# EAGLE board hexapod - Copy (EAGLE 6.4), part 1 of 2
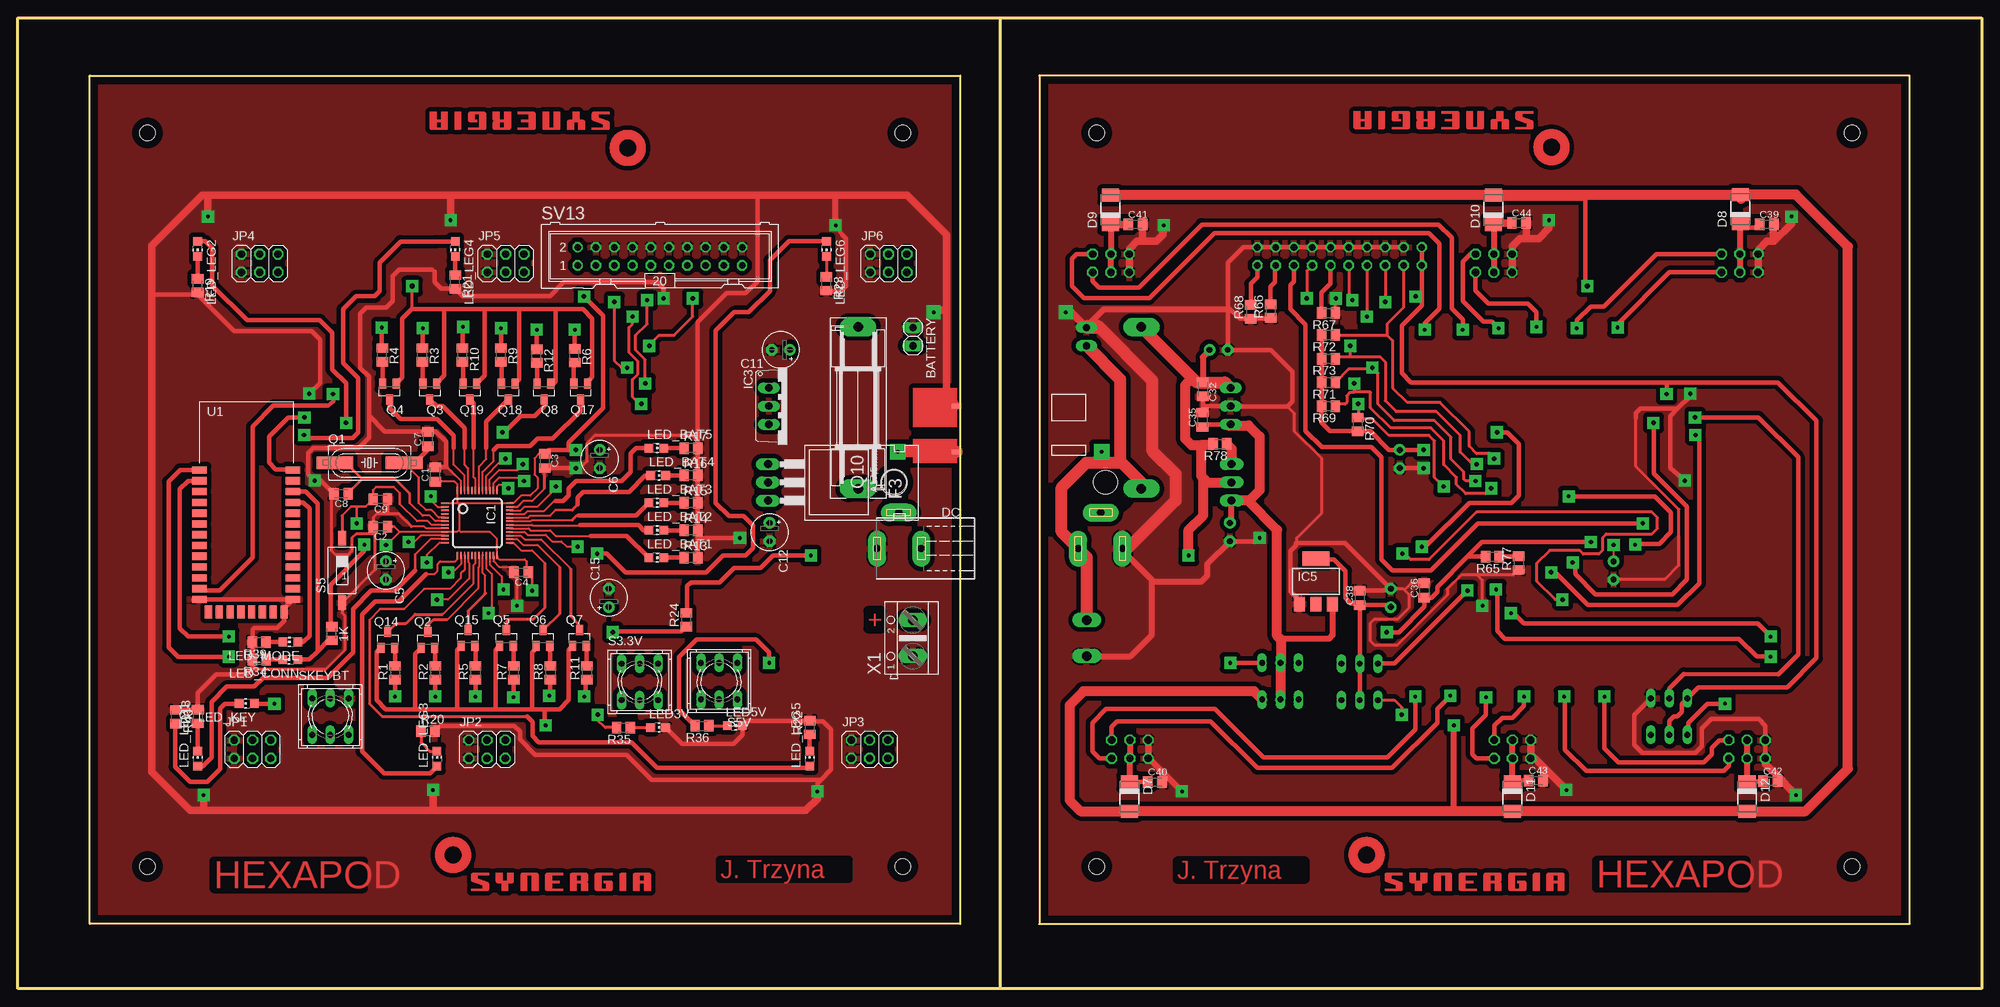
[diagram p0: board, top side]
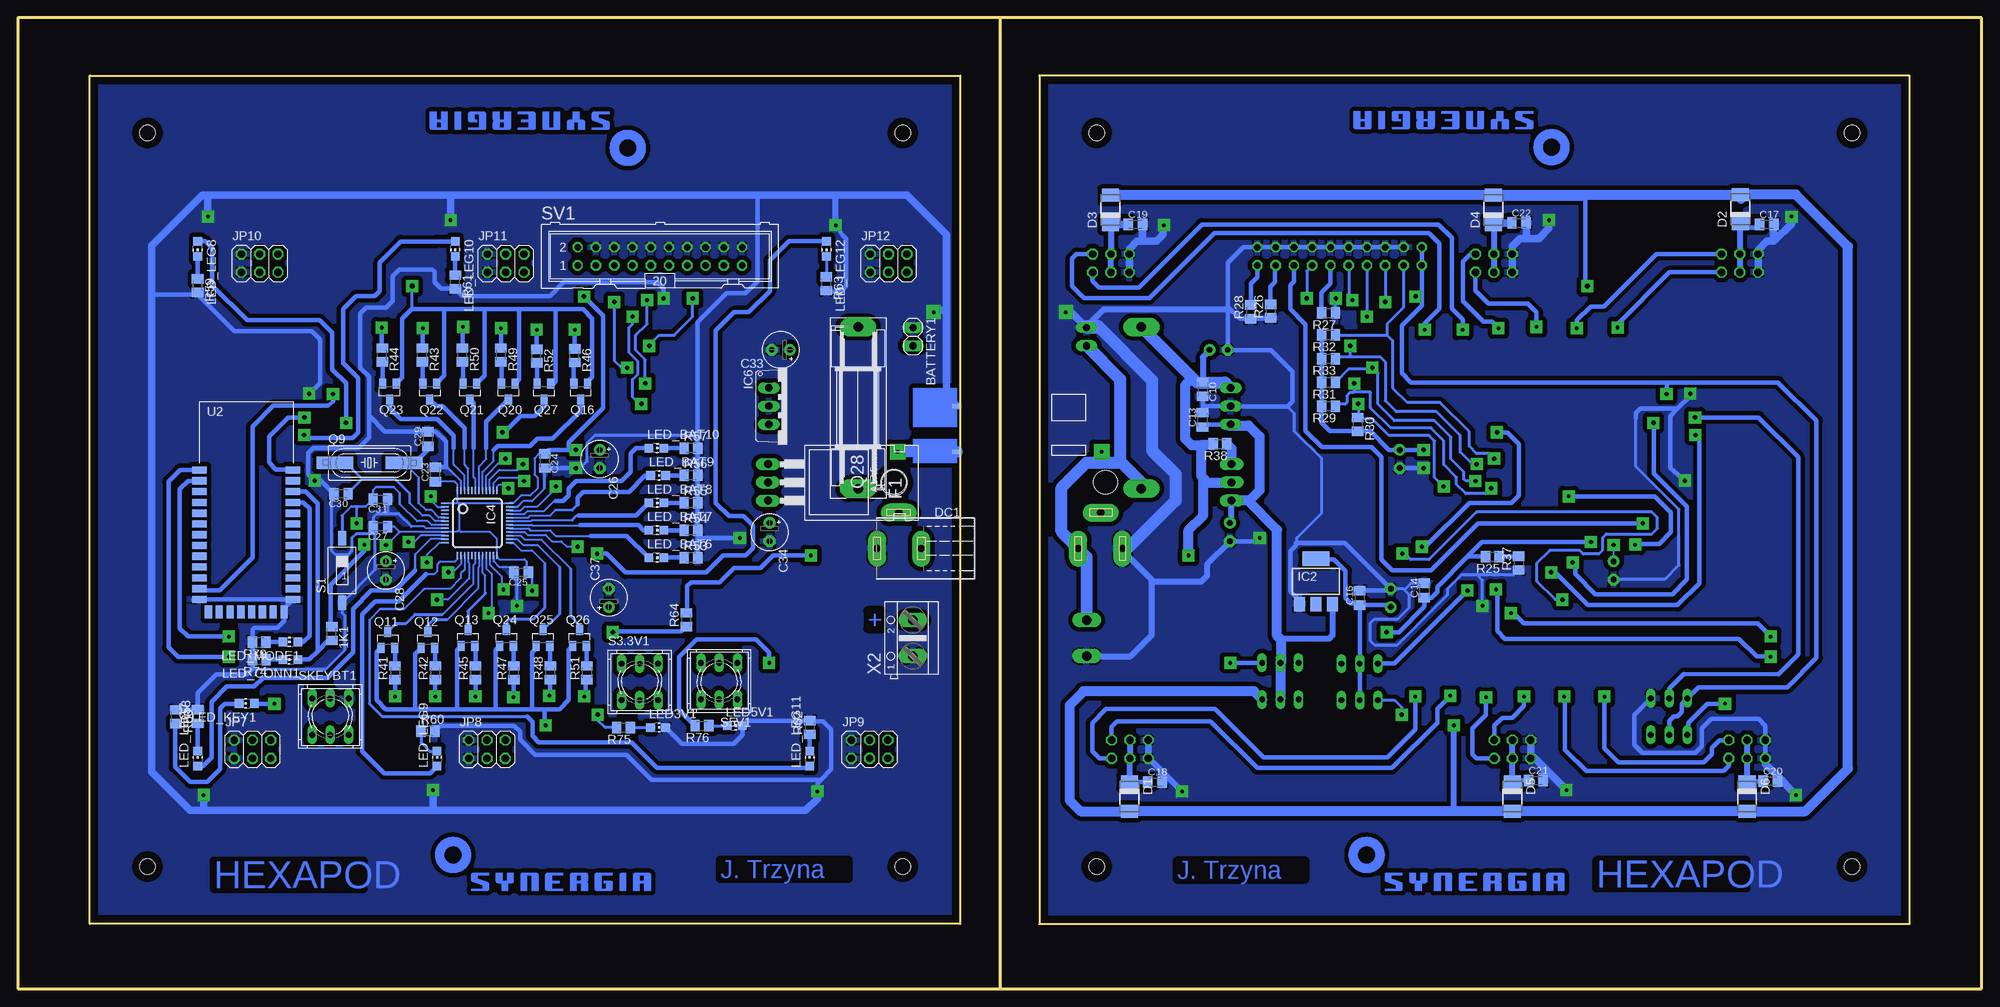
[diagram p1: board, bottom side, seen from below]

Size 273 x 135 mm. Coordinates in mm from the lower left corner, seen from the top.
Outline: 136.5,135 0,135 0,0 136.5,0
Outline: 136.5,135 273,135 273,0 136.5,0
Outline: 136.5,135 136.5,0
Outline: 10,127 131,127 131,9 10,9 10,127
Outline: 263,127 142,127 142,9 263,9 263,127
Copper layers (1*16): Top 0.035mm / dielectric 1.5mm / Bottom 0.035mm
Design rules "default": minimum track width 10mil, minimum drill 24mil, track to track 8mil, track to pad 8mil, pad to pad 8mil, via to via 8mil, smd to smd 8mil, copper to edge 40mil, drill to drill 8mil, minimum pad ring 10mil, minimum via ring 8mil, stop-mask expansion 4mil, vias tented up to drill 0mil, thermal gap 10mil
Holes 2.2 mm at 18,119 123,119 123,17 18,17 255,119 150,119 150,17 255,17

## Footprints (pad centres in the part's own frame; a part is rotated, then mirrored left to right if it is on the bottom)
M0805 = smd 1.3 x 1.6: 1 -0.95,0; 2 0.95,0
1X02 = drill 1.016 long: 1 -1.27,0; 2 1.27,0
C0805K = smd 1.3 x 1.6: 1 -1,0; 2 1,0
E2,5-5 = drill 0.813 pad 1.6: + -1.27,0 | drill 0.813 pad 1.6 octagon: - 1.27,0
DO-214AC = smd 1.8 x 2.4: A 2.025,0; C -2.025,0
733980-62 = drill 1 pad 2.5 long: 1 0,8.57; 2 0,2.42; 3 5,5.57
SH22,5 = drill 1.321 pad 2.54 long: 1 -11.252,0; 2 11.252,0
TQFP48 = smd 0.2 x 1: 1 -2.75,-4.5; 2 -2.25,-4.5; 3 -1.75,-4.5; 4 -1.25,-4.5; 5 -0.75,-4.5; 6 -0.25,-4.5; 7 0.25,-4.5; 8 0.75,-4.5; 9 1.25,-4.5; 10 1.75,-4.5; 11 2.25,-4.5; 12 2.75,-4.5; 25 2.75,4.5; 26 2.25,4.5; 27 1.75,4.5; 28 1.25,4.5; 29 0.75,4.5; 30 0.25,4.5; 31 -0.25,4.5; 32 -0.75,4.5; 33 -1.25,4.5; 34 -1.75,4.5; 35 -2.25,4.5; 36 -2.75,4.5 | smd 1 x 0.2: 13 4.5,-2.75; 14 4.5,-2.25; 15 4.5,-1.75; 16 4.5,-1.25; 17 4.5,-0.75; 18 4.5,-0.25; 19 4.5,0.25; 20 4.5,0.75; 21 4.5,1.25; 22 4.5,1.75; 23 4.5,2.25; 24 4.5,2.75; 37 -4.5,2.75; 38 -4.5,2.25; 39 -4.5,1.75; 40 -4.5,1.25; 41 -4.5,0.75; 42 -4.5,0.25; 43 -4.5,-0.25; 44 -4.5,-0.75; 45 -4.5,-1.25; 46 -4.5,-1.75; 47 -4.5,-2.25; 48 -4.5,-2.75
SOT223 = smd 1.5 x 2: 1 -2.3,-3.15; 2 0,-3.15; 3 2.3,-3.15 | smd 3.8 x 2: 4 0,3.15
TO220V = drill 1.016 long: 1 -2.54,-2.54; 2 0,-2.54; 3 2.54,-2.54
2X03 = drill 1.016 octagon: 1 -2.54,-1.27; 2 -2.54,1.27; 3 0,-1.27; 4 0,1.27; 5 2.54,-1.27; 6 2.54,1.27
CHIP-LED0805 = smd 1.2 x 1.2: A 0,-1.05; C 0,1.05
SM49 = smd 5.08 x 1.778: 1 -4.826,0; 2 4.826,0
SOT23 = smd 1 x 1.4: 1 -0.95,-1.1; 2 0.95,-1.1; 3 0,1.1
TO220 = drill 1.118 long: 1 -2.54,-6.35; 2 0,-6.35; 3 2.54,-6.35 | hole 3.302: 0,11.176
SMS-001 = smd 1.092 x 2.007: 1 0,-4.496; 2 0,4.496
9077-2 = drill 0.813 long: 1 -2.54,2.54; 2 0,2.54; 3 2.54,2.54; 4 -2.54,-2.54; 5 0,-2.54; 6 2.54,-2.54
ML20 = drill 0.914 octagon: 1 -11.43,-1.27; 2 -11.43,1.27; 3 -8.89,-1.27; 4 -8.89,1.27; 5 -6.35,-1.27; 6 -6.35,1.27; 7 -3.81,-1.27; 8 -3.81,1.27; 9 -1.27,-1.27; 10 -1.27,1.27; 11 1.27,-1.27; 12 1.27,1.27; 13 3.81,-1.27; 14 3.81,1.27; 15 6.35,-1.27; 16 6.35,1.27; 17 8.89,-1.27; 18 8.89,1.27; 19 11.43,-1.27; 20 11.43,1.27
BLUETOOTH_SMD = smd 2 x 1: 1 0,0; 2 0,-1.5; 3 0,-3; 4 0,-4.5; 5 0,-6; 6 0,-7.5; 7 0,-9; 8 0,-10.5; 9 0,-12; 10 0,-13.5; 11 0,-15; 12 0,-16.5; 13 0,-18; 22 13,-18; 23 13,-16.5; 24 13,-15; 25 13,-13.5; 26 13,-12; 27 13,-10.5; 28 13,-9; 29 13,-7.5; 30 13,-6; 31 13,-4.5; 32 13,-3; 33 13,-1.5; 34 13,0 | smd 1 x 1.8: 14 1.25,-19.75; 15 2.75,-19.75; 16 4.25,-19.75; 17 5.75,-19.75; 18 7.25,-19.75; 19 8.75,-19.75; 20 10.25,-19.75; 21 11.75,-19.75
DEANSM = smd 1.27 x 0.635: P$NEG 3.175,3.81; P$POS 3.175,-2.54
AK500/2 = drill 1.321 long: 1 -2.515,0; 2 2.515,0

## Placement (x,y rotation side)
1K  470  [M0805]  43.63,49.39 270 top
1K1  470  [M0805]  229.37,49.39 270 bottom
BATTERY  [1X02]  124.44,90.68 270 top
BATTERY1  [1X02]  148.56,90.68 270 bottom
C1  100n  [C0805K]  58.01,71.53 90 top
C2  10n  [C0805K]  50.39,64.26 180 top
C3  100n  [C0805K]  73.25,73.41 270 top
C4  100n  [C0805K]  69.95,57.91 180 top
C5  1u  [E2,5-5]  51.15,58.17 270 top
C6  4.7uF  [E2,5-5]  80.87,73.66 270 top
C7  10p  [C0805K]  56.99,76.45 90 top
C8  10p  [C0805K]  44.9,68.83 180 top
C9  100n  [C0805K]  50.39,68.07 180 top
C10  100n  [C0805K]  108.25,83.36 270 bottom
C11  47uF  [E2,5-5]  106.07,88.85 180 top
C12  47uF  [E2,5-5]  104.5,63.5 270 top
C13  100n  [C0805K]  108.32,79.12 90 bottom
C14  100n  [C0805K]  77.46,55.37 90 bottom
C15  47uF  [E2,5-5]  82.14,54.36 90 top
C16  100n  [C0805K]  86.46,54.36 90 bottom
C17  100n  [C0805K]  29.86,106.27 0 bottom
C18  100n  [C0805K]  114.9,28.75 0 bottom
C19  100n  [C0805K]  117.65,106.27 0 bottom
C20  100n  [C0805K]  29.36,28.85 0 bottom
C21  100n  [C0805K]  61.97,28.96 0 bottom
C22  100n  [C0805K]  64.31,106.48 0 bottom
C23  100n  [C0805K]  214.99,71.53 90 bottom
C24  100n  [C0805K]  199.75,73.41 270 bottom
C25  100n  [C0805K]  203.05,57.91 180 bottom
C26  4.7uF  [E2,5-5]  192.13,73.66 270 bottom
C27  10n  [C0805K]  222.61,64.26 180 bottom
C28  1u  [E2,5-5]  221.85,58.17 270 bottom
C29  10p  [C0805K]  216.01,76.45 90 bottom
C30  10p  [C0805K]  228.1,68.83 180 bottom
C31  100n  [C0805K]  222.61,68.07 180 bottom
C32  100n  [C0805K]  164.75,83.36 270 top
C33  47uF  [E2,5-5]  166.93,88.85 180 bottom
C34  47uF  [E2,5-5]  168.5,63.5 270 bottom
C35  100n  [C0805K]  164.68,79.12 90 top
C36  100n  [C0805K]  195.54,55.37 90 top
C37  47uF  [E2,5-5]  190.86,54.36 90 bottom
C38  100n  [C0805K]  186.54,54.36 90 top
C39  100n  [C0805K]  243.14,106.27 0 top
C40  100n  [C0805K]  158.1,28.75 0 top
C41  100n  [C0805K]  155.35,106.27 0 top
C42  100n  [C0805K]  243.64,28.85 0 top
C43  100n  [C0805K]  211.03,28.96 0 top
C44  100n  [C0805K]  208.69,106.48 0 top
D1  [DO-214AC]  118.46,26.72 270 bottom
D2  [DO-214AC]  33.52,108.41 90 bottom
D3  [DO-214AC]  121.1,108.31 90 bottom
D4  [DO-214AC]  67.86,108.31 90 bottom
D5  [DO-214AC]  65.22,26.72 270 bottom
D6  [DO-214AC]  32.61,26.72 270 bottom
D7  [DO-214AC]  154.54,26.72 270 top
D8  [DO-214AC]  239.48,108.41 90 top
D9  [DO-214AC]  151.9,108.31 90 top
D10  [DO-214AC]  205.14,108.31 90 top
D11  [DO-214AC]  207.78,26.72 270 top
D12  [DO-214AC]  240.39,26.72 270 top
DC  [733980-62]  128.02,61.21 90 top
DC1  [733980-62]  144.98,61.21 90 bottom
F1  2A  [SH22,5]  156.19,80.79 90 bottom
F3  2A  [SH22,5]  116.81,80.79 90 top
IC1  STM32F10XCXT6  [TQFP48]  63.85,64.77 270 top
IC2  LM1117S(3.3)  [SOT223]  92.55,56.64 0 bottom
IC3  7805TV  [TO220V]  106.93,81.03 270 top
IC4  STM32F10XCXT6  [TQFP48]  209.15,64.77 270 bottom
IC5  LM1117S(3.3)  [SOT223]  180.45,56.64 0 top
IC6  7805TV  [TO220V]  166.07,81.03 270 bottom
JP1  [2X03]  32.6,33.3 0 top
JP2  [2X03]  65.21,33.3 0 top
JP3  [2X03]  118.4,33.3 0 top
JP4  [2X03]  33.6,100.9 0 top
JP5  [2X03]  67.8,100.9 0 top
JP6  [2X03]  121.04,100.9 0 top
JP7  [2X03]  240.4,33.3 0 bottom
JP8  [2X03]  207.79,33.3 0 bottom
JP9  [2X03]  154.6,33.3 0 bottom
JP10  [2X03]  239.4,100.9 0 bottom
JP11  [2X03]  205.2,100.9 0 bottom
JP12  [2X03]  151.96,100.9 0 bottom
LED3V  Green  [CHIP-LED0805]  89,36.32 270 top
LED3V1  Green  [CHIP-LED0805]  184,36.32 270 bottom
LED5V  Green  [CHIP-LED0805]  99.66,36.58 270 top
LED5V1  Green  [CHIP-LED0805]  173.34,36.58 270 bottom
LED_BAT1  Green  [CHIP-LED0805]  88.74,59.94 270 top
LED_BAT2  Green  [CHIP-LED0805]  88.74,63.75 270 top
LED_BAT3  Green  [CHIP-LED0805]  88.74,67.56 270 top
LED_BAT4  Yellow  [CHIP-LED0805]  89,71.37 270 top
LED_BAT5  Red  [CHIP-LED0805]  88.74,75.18 270 top
LED_BAT6  Green  [CHIP-LED0805]  184.26,59.94 270 bottom
LED_BAT7  Green  [CHIP-LED0805]  184.26,63.75 270 bottom
LED_BAT8  Green  [CHIP-LED0805]  184.26,67.56 270 bottom
LED_BAT9  Yellow  [CHIP-LED0805]  184,71.37 270 bottom
LED_BAT10  Red  [CHIP-LED0805]  184.26,75.18 270 bottom
LED_CONN  blue  [CHIP-LED0805]  37.88,45.77 90 top
LED_CONN1  blue  [CHIP-LED0805]  235.12,45.77 90 bottom
LED_KEY  red  [CHIP-LED0805]  31.81,39.68 90 top
LED_KEY1  red  [CHIP-LED0805]  241.19,39.68 90 bottom
LED_LEG1  blue  [CHIP-LED0805]  24.99,32 0 top
LED_LEG2  blue  [CHIP-LED0805]  24.99,102.9 180 top
LED_LEG3  blue  [CHIP-LED0805]  58.26,32 0 top
LED_LEG4  blue  [CHIP-LED0805]  60.8,102.9 180 top
LED_LEG5  blue  [CHIP-LED0805]  110.08,32 0 top
LED_LEG6  blue  [CHIP-LED0805]  112.41,102.9 180 top
LED_LEG7  blue  [CHIP-LED0805]  248.01,32 0 bottom
LED_LEG8  blue  [CHIP-LED0805]  248.01,102.9 180 bottom
LED_LEG9  blue  [CHIP-LED0805]  214.74,32 0 bottom
LED_LEG10  blue  [CHIP-LED0805]  212.2,102.9 180 bottom
LED_LEG11  blue  [CHIP-LED0805]  162.92,32 0 bottom
LED_LEG12  blue  [CHIP-LED0805]  160.59,102.9 180 bottom
LED_MODE  green  [CHIP-LED0805]  37.9,48.22 90 top
LED_MODE1  green  [CHIP-LED0805]  235.1,48.22 90 bottom
Q1  24MHz  [SM49]  48.86,73.15 0 top
Q2  SST5486  [SOT23]  56.99,48.51 0 top
Q3  SST5486  [SOT23]  57.25,83.06 180 top
Q4  SST5486  [SOT23]  51.66,83.06 180 top
Q5  SST5486  [SOT23]  67.91,48.77 0 top
Q6  SST5486  [SOT23]  72.99,48.77 0 top
Q7  SST5486  [SOT23]  78.07,48.77 0 top
Q8  SST5486  [SOT23]  73.15,83.06 180 top
Q9  24MHz  [SM49]  224.14,73.15 0 bottom
Q10  BUZ11  [TO220]  110.63,70.42 270 top
Q11  SST5486  [SOT23]  221.6,48.51 0 bottom
Q12  SST5486  [SOT23]  216.01,48.51 0 bottom
Q13  SST5486  [SOT23]  210.42,48.77 0 bottom
Q14  SST5486  [SOT23]  51.4,48.51 0 top
Q15  SST5486  [SOT23]  62.58,48.77 0 top
Q16  SST5486  [SOT23]  194.77,83.06 180 bottom
Q17  SST5486  [SOT23]  78.23,83.06 180 top
Q18  SST5486  [SOT23]  68.17,83.06 180 top
Q19  SST5486  [SOT23]  62.83,83.06 180 top
Q20  SST5486  [SOT23]  204.83,83.06 180 bottom
Q21  SST5486  [SOT23]  210.17,83.06 180 bottom
Q22  SST5486  [SOT23]  215.75,83.06 180 bottom
Q23  SST5486  [SOT23]  221.34,83.06 180 bottom
Q24  SST5486  [SOT23]  205.09,48.77 0 bottom
Q25  SST5486  [SOT23]  200.01,48.77 0 bottom
Q26  SST5486  [SOT23]  194.93,48.77 0 bottom
Q27  SST5486  [SOT23]  199.85,83.06 180 bottom
Q28  BUZ11  [TO220]  162.37,70.42 270 bottom
R1  1k  [M0805]  52.42,43.94 90 top
R2  1k  [M0805]  58.01,43.94 90 top
R3  1k  [M0805]  56.23,88.14 270 top
R4  1k  [M0805]  50.64,88.14 270 top
R5  1k  [M0805]  63.6,43.94 90 top
R6  1k  [M0805]  77.41,88.04 270 top
R7  1k  [M0805]  68.93,43.94 90 top
R8  1k  [M0805]  74.01,43.94 90 top
R9  1k  [M0805]  67.15,88.14 270 top
R10  1k  [M0805]  61.82,88.14 270 top
R11  1k  [M0805]  79.09,43.94 90 top
R12  1k  [M0805]  72.13,87.99 270 top
R13  470  [M0805]  93.57,59.94 0 top
R14  470  [M0805]  93.57,63.75 0 top
R15  470  [M0805]  93.57,67.56 0 top
R16  470  [M0805]  93.57,71.37 0 top
R17  470  [M0805]  93.57,75.18 0 top
R18  470  [M0805]  24.99,37.85 90 top
R19  470  [M0805]  24.99,97.79 270 top
R20  470  [M0805]  56.99,35.81 0 top
R21  470  [M0805]  60.8,98.3 270 top
R22  470  [M0805]  110.08,36.32 90 top
R23  470  [M0805]  112.41,98.04 270 top
R24  3K9  [M0805]  92.91,51.31 90 top
R25  2k2  [M0805]  68.02,60.1 180 bottom
R26  10k  [M0805]  98.85,94.23 90 bottom
R27  10k  [M0805]  90.77,93.98 180 bottom
R28  10k  [M0805]  101.59,94.13 90 bottom
R29  10k  [M0805]  90.77,81.03 180 bottom
R30  10k  [M0805]  86.71,78.49 270 bottom
R31  10k  [M0805]  90.77,84.33 180 bottom
R32  10k  [M0805]  90.77,90.93 180 bottom
R33  10k  [M0805]  90.77,87.63 180 bottom
R34  470  [M0805]  33.56,45.77 180 top
R35  470  [M0805]  84.17,36.32 180 top
R36  680  [M0805]  95.09,36.58 180 top
R37  680R  [M0805]  64.36,59.18 90 bottom
R38  680R  [M0805]  105.88,75.77 180 bottom
R39  470  [M0805]  33.55,48.19 180 top
R40  470  [M0805]  22,37.82 270 top
R41  1k  [M0805]  220.58,43.94 90 bottom
R42  1k  [M0805]  214.99,43.94 90 bottom
R43  1k  [M0805]  216.77,88.14 270 bottom
R44  1k  [M0805]  222.36,88.14 270 bottom
R45  1k  [M0805]  209.4,43.94 90 bottom
R46  1k  [M0805]  195.59,88.04 270 bottom
R47  1k  [M0805]  204.07,43.94 90 bottom
R48  1k  [M0805]  198.99,43.94 90 bottom
R49  1k  [M0805]  205.85,88.14 270 bottom
R50  1k  [M0805]  211.18,88.14 270 bottom
R51  1k  [M0805]  193.91,43.94 90 bottom
R52  1k  [M0805]  200.87,87.99 270 bottom
R53  470  [M0805]  179.43,59.94 0 bottom
R54  470  [M0805]  179.43,63.75 0 bottom
R55  470  [M0805]  179.43,67.56 0 bottom
R56  470  [M0805]  179.43,71.37 0 bottom
R57  470  [M0805]  179.43,75.18 0 bottom
R58  470  [M0805]  248.01,37.85 90 bottom
R59  470  [M0805]  248.01,97.79 270 bottom
R60  470  [M0805]  216.01,35.81 0 bottom
R61  470  [M0805]  212.2,98.3 270 bottom
R62  470  [M0805]  162.92,36.32 90 bottom
R63  470  [M0805]  160.59,98.04 270 bottom
R64  3K9  [M0805]  180.09,51.31 90 bottom
R65  2k2  [M0805]  204.98,60.1 180 top
R66  10k  [M0805]  174.15,94.23 90 top
R67  10k  [M0805]  182.23,93.98 180 top
R68  10k  [M0805]  171.41,94.13 90 top
R69  10k  [M0805]  182.23,81.03 180 top
R70  10k  [M0805]  186.29,78.49 270 top
R71  10k  [M0805]  182.23,84.33 180 top
R72  10k  [M0805]  182.23,90.93 180 top
R73  10k  [M0805]  182.23,87.63 180 top
R74  470  [M0805]  239.44,45.77 180 bottom
R75  470  [M0805]  188.83,36.32 180 bottom
R76  680  [M0805]  177.91,36.58 180 bottom
R77  680R  [M0805]  208.64,59.18 90 top
R78  680R  [M0805]  167.12,75.77 180 top
R79  470  [M0805]  239.45,48.19 180 bottom
R80  470  [M0805]  251,37.82 270 bottom
S1  reset  [SMS-001]  227.95,58.17 0 bottom
S3.3V  9077-2  [9077-2]  86.46,42.67 0 top
S3.3V1  9077-2  [9077-2]  186.54,42.67 0 bottom
S5  reset  [SMS-001]  45.05,58.17 0 top
S5V  9077-2  [9077-2]  97.48,42.77 180 top
S5V1  9077-2  [9077-2]  175.52,42.77 180 bottom
SKEYBT  9077-2  [9077-2]  43.43,37.85 0 top
SKEYBT1  9077-2  [9077-2]  229.57,37.85 0 bottom
SV1  [ML20]  183.75,101.85 0 bottom
SV13  [ML20]  89.25,101.85 0 top
U1  HC_06  [BLUETOOTH_SMD]  25.24,72.14 0 top
U2  HC_06  [BLUETOOTH_SMD]  247.76,72.14 0 bottom
U$1  DEANS.MALE  [DEANSM]  127.33,77.22 0 top
U$2  [SYNERGIA_30MM]  58.01,13.61 0 top
U$3  [SYNERGIA_30MM]  87.27,121.92 180 top
U$4  [SYNERGIA_30MM]  57.3,122.02 180 bottom
U$5  [SYNERGIA_30MM]  87.98,13.61 0 bottom
U$6  DEANS.MALE  [DEANSM]  145.67,77.22 0 bottom
U$7  [SYNERGIA_30MM]  214.99,13.61 0 bottom
U$8  [SYNERGIA_30MM]  185.73,121.92 180 bottom
U$9  [SYNERGIA_30MM]  215.7,122.02 180 top
U$10  [SYNERGIA_30MM]  185.02,13.61 0 top
X1  DC  [AK500/2]  124.41,48.77 90 top
X2  DC  [AK500/2]  148.59,48.77 90 bottom

## Library data of the parts
1K 1K1 R1-R80 = resistor
BATTERY BATTERY1 JP1-JP12 = pinhead
C1-C44 = rcl
D1-D12 = diode
DC DC1 = con-conrad
F1 F3 = fuse; MF: SCHURTER; MPN: 0031.8201; OC_FARNELL: 1162740; OC_NEWARK: 96F8317
IC1 IC4 = stm32
IC2 IC5 = v-reg
IC3 IC6 = linear
LED3V LED3V1 LED5V LED5V1 LED_BAT1-LED_BAT10 LED_CONN LED_CONN1 LED_KEY LED_KEY1 LED_LEG1-LED_LEG12 LED_MODE LED_MODE1 = led
Q1 Q9 = crystal; OC_FARNELL: unknown; OC_NEWARK: unknown
Q2-Q8 Q10-Q28 = transistor-fet
S1 S5 = smd-special
S3.3V S3.3V1 S5V S5V1 SKEYBT SKEYBT1 = switch-misc
SV1 SV13 = con-harting-ml; OC_FARNELL: unknown; OC_NEWARK: unknown
U1 U2 = SerialPortBluetooth
U$1 U$6 = bt_electromech
U$2-U$5 U$7-U$10 = synergia_logo
X1 X2 = con-ptr500; OC_FARNELL: unknown; OC_NEWARK: unknown

## Nets
+3V1: C23.1 C24.1 C25.1 C26.+ C27.1 C28.+ IC4.1 IC4.9 IC4.24 IC4.36 IC4.48 R69.2 R70.2 R71.2 R72.2 R73.2 S3.3V1.1 SKEYBT1.1 SKEYBT1.5 SV1.1 SV1.2 U2.12
+3V3: C1.1 C2.1 C3.1 C4.1 C5.+ C6.+ IC1.1 IC1.9 IC1.24 IC1.36 IC1.48 R29.2 R30.2 R31.2 R32.2 R33.2 S3.3V.1 SKEYBT.1 SKEYBT.5 SV13.1 SV13.2 U1.12
+5V: D1.A D2.A D3.A D4.A D5.A D6.A Q2.1 Q3.1 Q4.1 Q5.1 Q6.1 Q7.1 Q8.1 Q14.1 Q15.1 Q17.1 Q18.1 Q19.1 S5V.1
+5V1: D7.A D8.A D9.A D10.A D11.A D12.A Q11.1 Q12.1 Q13.1 Q16.1 Q20.1 Q21.1 Q22.1 Q23.1 Q24.1 Q25.1 Q26.1 Q27.1 S5V1.1
ADC: C14.1 IC1.10 R24.1 R25.2
ADC1: C36.1 IC4.10 R64.1 R65.2
CONN: 1K.2 LED_CONN.A U1.32
CONN1: 1K1.2 LED_CONN1.A U2.32
GND: BATTERY.1 C1.2 C2.2 C3.2 C4.2 C5.- C6.- C7.2 C8.2 C9.1 C10.2 C11.- C12.- C13.2 C14.2 C15.- C16.2 C17.2 C18.2 C19.2 C20.2 C21.2 C22.2 DC.1 IC1.8 IC1.23 IC1.35 IC1.47 IC2.1 IC3.2 JP1.1 JP1.2 JP2.1 JP2.2 JP3.1 JP3.2 JP4.1 JP4.2 JP5.1 JP5.2 JP6.1 JP6.2 LED3V.C LED5V.C R13.2 R14.2 R15.2 R16.2 R17.2 R18.2 R19.2 R20.2 R21.2 R22.2 R23.2 R26.1 R27.1 R28.1 R34.2 R37.1 R39.2 R40.1 S5.1 SKEYBT.3 SV13.4 SV13.6 SV13.8 SV13.10 SV13.12 SV13.14 SV13.16 SV13.18 SV13.20 U1.13 U1.21 U1.22 U$1.P$NEG X1.1
GND1: BATTERY1.1 C23.2 C24.2 C25.2 C26.- C27.2 C28.- C29.2 C30.2 C31.1 C32.2 C33.- C34.- C35.2 C36.2 C37.- C38.2 C39.2 C40.2 C41.2 C42.2 C43.2 C44.2 DC1.1 IC4.8 IC4.23 IC4.35 IC4.47 IC5.1 IC6.2 JP7.1 JP7.2 JP8.1 JP8.2 JP9.1 JP9.2 JP10.1 JP10.2 JP11.1 JP11.2 JP12.1 JP12.2 LED3V1.C LED5V1.C R53.2 R54.2 R55.2 R56.2 R57.2 R58.2 R59.2 R60.2 R61.2 R62.2 R63.2 R66.1 R67.1 R68.1 R74.2 R77.1 R79.2 R80.1 S1.1 SKEYBT1.3 SV1.4 SV1.6 SV1.8 SV1.10 SV1.12 SV1.14 SV1.16 SV1.18 SV1.20 U2.13 U2.21 U2.22 U$6.P$NEG X2.1
JTCK: IC1.37 R29.1 SV13.9
JTCK1: IC4.37 R69.1 SV1.9
JTDI: IC1.38 R31.1 SV13.5
JTDI1: IC4.38 R71.1 SV1.5
JTDO: IC1.39 R33.1 SV13.13
JTDO1: IC4.39 R73.1 SV1.13
JTMS: IC1.34 R30.1 SV13.7
JTMS1: IC4.34 R70.1 SV1.7
KEY: SKEYBT.2 U1.34
KEY1: SKEYBT1.2 U2.34
LED1: IC1.11 LED_LEG1.A
LED2: IC1.12 LED_LEG2.A
LED3: IC1.13 LED_LEG3.A
LED4: IC1.14 LED_LEG4.A
LED5: IC1.15 LED_LEG5.A
LED6: IC1.16 LED_LEG6.A
LED7: IC4.11 LED_LEG7.A
LED8: IC4.12 LED_LEG8.A
LED9: IC4.13 LED_LEG9.A
LED10: IC4.14 LED_LEG10.A
LED11: IC4.15 LED_LEG11.A
LED12: IC4.16 LED_LEG12.A
LED_BAT1: IC1.29 LED_BAT1.A
LED_BAT2: IC1.30 LED_BAT2.A
LED_BAT3: IC1.31 LED_BAT3.A
LED_BAT4: IC1.32 LED_BAT4.A
LED_BAT5: IC1.33 LED_BAT5.A
LED_BAT6: IC4.29 LED_BAT6.A
LED_BAT7: IC4.30 LED_BAT7.A
LED_BAT8: IC4.31 LED_BAT8.A
LED_BAT9: IC4.32 LED_BAT9.A
LED_BAT10: IC4.33 LED_BAT10.A
MODE: LED_MODE.A U1.31
MODE1: LED_MODE1.A U2.31
N$1: C7.1 IC1.5 Q1.2
N$2: C8.1 IC1.6 Q1.1
N$3: 1K.1 IC1.2
N$4: Q14.2 R1.2
N$5: JP5.5 R10.1
N$6: Q2.2 R2.2
N$7: JP3.5 R11.1
N$8: JP5.6 R9.1
N$9: JP3.6 R8.1
N$10: R25.1 R37.2
N$11: JP6.5 R12.1
N$12: Q15.2 R5.2
N$13: JP2.5 R7.1
N$14: Q18.2 R9.2
N$15: JP2.6 R5.1
N$16: JP6.6 R6.1
N$17: JP1.6 R1.1
N$18: JP4.6 R3.1
N$19: JP4.5 R4.1
N$20: Q19.2 R10.2
N$21: JP1.5 R2.1
N$22: R36.2 S5V.4
N$23: C10.1 C11.+ F3.2 IC3.1 Q10.2 R24.2 R38.2
N$24: Q10.1 R38.1
N$25: LED_MODE.C R39.1
N$26: LED_KEY.A SKEYBT.4
N$27: LED_KEY.C R40.2
N$28: LED_BAT1.C R13.1
N$29: LED_LEG1.C R18.1
N$30: LED_BAT2.C R14.1
N$31: LED_LEG2.C R19.1
N$32: LED_BAT3.C R15.1
N$33: LED_LEG3.C R20.1
N$34: LED_BAT4.C R16.1
N$35: LED_LEG4.C R21.1
N$36: LED_BAT5.C R17.1
N$37: LED_LEG5.C R22.1
N$38: LED_LEG6.C R23.1
N$39: C18.1 D1.C JP3.3 JP3.4
N$40: LED_CONN.C R34.1
N$41: C15.+ C16.1 IC2.4 S3.3V.2 S3.3V.5
N$42: C12.+ C13.1 IC2.3 IC3.3 Q10.3 S5V.2 S5V.5
N$43: Q17.2 R6.2
N$44: R27.2 SV13.11
N$45: Q3.2 R3.2
N$46: R35.2 S3.3V.4
N$47: R26.2 SV13.17
N$48: R28.2 SV13.19
N$49: LED3V.A R35.1
N$50: C17.1 D2.C JP4.3 JP4.4
N$51: LED5V.A R36.1
N$52: BATTERY.2 DC.2 F3.1 U$1.P$POS X1.2
N$53: Q4.2 R4.2
N$54: Q5.2 R7.2
N$55: Q6.2 R8.2
N$56: Q7.2 R11.2
N$57: Q8.2 R12.2
N$58: C19.1 D3.C JP6.3 JP6.4
N$59: C22.1 D4.C JP5.3 JP5.4
N$60: C21.1 D5.C JP2.3 JP2.4
N$61: C20.1 D6.C JP1.3 JP1.4
N$62: C29.1 IC4.5 Q9.2
N$63: C30.1 IC4.6 Q9.1
N$64: Q11.2 R41.2
N$65: LED_BAT6.C R53.1
N$66: LED_BAT7.C R54.1
N$67: LED_BAT8.C R55.1
N$68: LED_BAT9.C R56.1
N$69: LED_BAT10.C R57.1
N$70: LED_LEG7.C R58.1
N$71: LED_LEG8.C R59.1
N$72: LED_LEG9.C R60.1
N$73: LED_LEG10.C R61.1
N$74: LED_LEG11.C R62.1
N$75: LED_LEG12.C R63.1
N$76: R67.2 SV1.11
N$77: R66.2 SV1.17
N$78: R68.2 SV1.19
N$79: LED_CONN1.C R74.1
N$80: C37.+ C38.1 IC5.4 S3.3V1.2 S3.3V1.5
N$81: C34.+ C35.1 IC5.3 IC6.3 Q28.3 S5V1.2 S5V1.5
N$82: R75.2 S3.3V1.4
N$83: LED3V1.A R75.1
N$84: LED5V1.A R76.1
N$85: BATTERY1.2 DC1.2 F1.1 U$6.P$POS X2.2
N$86: Q12.2 R42.2
N$87: Q13.2 R45.2
N$88: Q16.2 R46.2
N$89: Q20.2 R49.2
N$90: Q21.2 R50.2
N$91: Q22.2 R43.2
N$92: Q23.2 R44.2
N$93: Q24.2 R47.2
N$94: Q25.2 R48.2
N$95: Q26.2 R51.2
N$96: Q27.2 R52.2
N$97: R65.1 R77.2
N$98: JP7.6 R41.1
N$99: JP7.5 R42.1
N$100: JP8.5 R47.1
N$101: JP8.6 R45.1
N$102: JP9.5 R51.1
N$103: JP9.6 R48.1
N$104: JP10.6 R43.1
N$105: JP10.5 R44.1
N$106: JP11.5 R50.1
N$107: JP11.6 R49.1
N$108: JP12.5 R52.1
N$109: JP12.6 R46.1
N$110: R76.2 S5V1.4
N$111: C32.1 C33.+ F1.2 IC6.1 Q28.2 R64.2 R78.2
N$112: Q28.1 R78.1
N$113: 1K1.1 IC4.2
N$114: LED_MODE1.C R79.1
N$115: LED_KEY1.A SKEYBT1.4
N$116: LED_KEY1.C R80.2
N$117: C40.1 D7.C JP9.3 JP9.4
N$118: C39.1 D8.C JP10.3 JP10.4
N$119: C41.1 D9.C JP12.3 JP12.4
N$120: C44.1 D10.C JP11.3 JP11.4
N$121: C43.1 D11.C JP8.3 JP8.4
N$122: C42.1 D12.C JP7.3 JP7.4
NJTRST: IC1.40 R32.1 SV13.3
NJTRST1: IC4.40 R72.1 SV1.3
RST: C9.2 IC1.7 S5.2 SV13.15
RST1: C31.2 IC4.7 S1.2 SV1.15
SERWO1: IC1.18 Q14.3
SERWO2: IC1.19 Q2.3
SERWO3: IC1.20 Q15.3
SERWO4: IC1.41 Q17.3
SERWO5: IC1.42 Q18.3
SERWO6: IC1.43 Q19.3
SERWO7: IC1.45 Q3.3
SERWO8: IC1.46 Q4.3
SERWO9: IC1.25 Q5.3
SERWO10: IC1.26 Q6.3
SERWO11: IC1.27 Q7.3
SERWO12: IC1.28 Q8.3
SERWO13: IC4.18 Q11.3
SERWO14: IC4.19 Q12.3
SERWO15: IC4.20 Q13.3
SERWO16: IC4.41 Q16.3
SERWO17: IC4.42 Q20.3
SERWO18: IC4.43 Q21.3
SERWO19: IC4.45 Q22.3
SERWO20: IC4.46 Q23.3
SERWO21: IC4.25 Q24.3
SERWO22: IC4.26 Q25.3
SERWO23: IC4.27 Q26.3
SERWO24: IC4.28 Q27.3
USART_RX: IC1.21 U1.2
USART_RX1: IC4.21 U2.2
USART_TX: IC1.22 U1.1
USART_TX1: IC4.22 U2.1

## Tracks (layer width: path | path; a pad name or v marks a point on that pad's centre or on a via)
+3V1  (via drill 0.6 pad 1.68)
  Top 0.254: C28.+ v221.85,61.72
  Top 0.61: SV1.2 SV1.1 195.18,96.52 | v229.22,82.7 229.22,84.33 | 229.22,84.33 193.66,84.33 192.39,85.6 192.39,92.2 195.18,95 195.18,96.52 | 229.22,84.33 244.71,84.33 250.04,78.99 250.04,45.97 246,41.93 233.65,41.93 SKEYBT1.1 231.35,39.62 231.35,38.51 230.74,37.9 230.23,37.9 229.57,37.24 SKEYBT1.5 | S3.3V1.1 191.37,45.21 v201.53,55.37 | R72.2 R73.2 R71.2 R69.2 181.21,80.96 181.21,78.74 182.41,77.54 R70.2 188,77.54 190.61,74.93 C26.+ v195.43,74.93 | v194.31,96.27 194.93,96.27 195.18,96.52
  Bottom 0.254: v221.85,61.72 221.74,61.72 | 211.9,67.52 IC4.36 204.61,67.56 204.07,67.56 203.05,68.58 201.78,68.58 | IC4.1 211.94,67.52 | 211.94,67.52 211.9,67.52 | 211.9,67.52 211.69,67.31 211.69,63.75 | 211.69,63.75 211.92,63.52 IC4.9 220.01,63.52 219.93,63.5 219.96,63.5 | 211.94,67.52 211.94,69.23 IC4.48 211.9,70.11 212.32,70.53 | C24.1 200.53,74.41 201.17,73.76 201.17,71.48 200.77,71.07 | C25.1 202.29,58.66 202.29,57.66 201.78,57.66 201.53,57.4 | 206.1,59.69 206.4,59.99 IC4.24 206.4,62.53 207.37,63.5 211.44,63.5 211.69,63.75
  Bottom 0.305: 212.32,70.53 C23.1 | 200.77,71.07 200.77,69.6 201.78,68.58 | 206.1,59.69 202.55,59.69
  Bottom 0.356: 221.74,61.72 219.96,63.5 220.73,64.26 C27.1 | 202.29,58.66 202.29,59.44 202.55,59.69 | 201.53,57.4 v201.53,55.37
  Bottom 0.61: 196.45,74.93 199.23,74.93 C24.1 | U2.12 247.77,55.63 248.01,55.63 247.76,55.37 244.96,55.37 240.39,59.94 240.39,78.18 237.5,81.08 229.88,81.08 229.16,81.69 v229.22,82.7 | v195.43,74.93 196.45,74.93 | 196.45,74.93 196.45,75.95 191.62,80.77 191.62,93.58 v194.31,96.27
+3V3  (via drill 0.6 pad 1.68)
  Top 0.254: v51.15,61.72 51.26,61.72 | 61.1,67.52 IC1.36 68.39,67.56 68.93,67.56 69.95,68.58 71.22,68.58 | IC1.1 61.06,67.52 | 61.06,67.52 61.1,67.52 | 61.1,67.52 61.31,67.31 61.31,63.75 | 61.31,63.75 61.08,63.52 IC1.9 52.99,63.52 53.07,63.5 53.04,63.5 | 61.06,67.52 61.06,69.23 IC1.48 61.1,70.11 60.68,70.53 | C3.1 72.47,74.41 71.83,73.76 71.83,71.48 72.23,71.07 | C4.1 70.71,58.66 70.71,57.66 71.22,57.66 71.47,57.4 | 66.9,59.69 66.6,59.99 IC1.24 66.6,62.53 65.63,63.5 61.56,63.5 61.31,63.75
  Top 0.305: 60.68,70.53 C1.1 | 72.23,71.07 72.23,69.6 71.22,68.58 | 66.9,59.69 70.45,59.69
  Top 0.356: 51.26,61.72 53.04,63.5 52.27,64.26 C2.1 | 70.71,58.66 70.71,59.44 70.45,59.69 | 71.47,57.4 v71.47,55.37
  Top 0.61: 76.55,74.93 73.77,74.93 C3.1 | U1.12 25.23,55.63 24.99,55.63 25.24,55.37 28.04,55.37 32.61,59.94 32.61,78.18 35.5,81.08 43.12,81.08 43.84,81.69 v43.78,82.7 | v77.57,74.93 76.55,74.93 | 76.55,74.93 76.55,75.95 81.38,80.77 81.38,93.58 v78.69,96.27
  Bottom 0.254: C5.+ v51.15,61.72
  Bottom 0.61: SV13.2 SV13.1 77.82,96.52 | v43.78,82.7 43.78,84.33 | 43.78,84.33 79.34,84.33 80.61,85.6 80.61,92.2 77.82,95 77.82,96.52 | 43.78,84.33 28.29,84.33 22.96,78.99 22.96,45.97 27,41.93 39.35,41.93 SKEYBT.1 41.65,39.62 41.65,38.51 42.26,37.9 42.77,37.9 43.43,37.24 SKEYBT.5 | S3.3V.1 81.63,45.21 v71.47,55.37 | R32.2 R33.2 R31.2 R29.2 91.79,80.96 91.79,78.74 90.59,77.54 R30.2 85,77.54 82.39,74.93 C6.+ v77.57,74.93 | v78.69,96.27 78.07,96.27 77.82,96.52
+5V  (via drill 0.6 pad 1.68, 0.7 pad 1.68)
  Top 0.406: 64.87,94.49 56.6,94.49 56.6,94.6 54.8,94.6 v54.8,97.7
  Top 0.61: Q7.1 76.55,47.09 76.55,40.13 75.28,38.86 73.25,38.86 | Q6.1 72.04,47.31 71.47,46.74 71.47,38.86 | Q15.1 61.56,47.6 | 61.56,47.6 61.56,47.24 | Q14.1 49.88,46.84 49.88,40.13 51.15,38.86 55.21,38.86 | 73.25,38.86 71.47,38.86 | 66.39,38.86 61.06,38.86 | 61.06,38.86 55.21,38.86 | Q5.1 66.39,47.09 66.39,38.86 | 61.56,47.6 61.06,47.09 61.06,38.86 | Q2.1 55.21,46.59 55.21,38.86 | Q4.1 53.44,84.99 53.44,93.22 54.71,94.49 59.28,94.49 | 59.28,94.49 64.87,94.49 | 64.87,94.49 69.69,94.49 | 69.69,94.49 74.77,94.49 | 74.77,94.49 78.58,94.49 79.85,93.22 79.85,85.09 79.18,84.41 Q17.1 | 74.77,94.49 74.77,84.43 74.5,84.16 Q8.1 | Q18.1 69.69,84.73 69.69,94.49 | Q19.1 64.87,85.24 64.87,94.49 | Q3.1 59.28,85.24 59.28,94.49 | 66.39,38.86 71.47,38.86 | v73.35,36.62 73.25,36.72 73.25,38.86
  Bottom 0.406: D4.A 67.36,109.83 55.06,109.83 | 65.24,24.7 65.24,24.69 73.35,24.69
  Bottom 0.61: v54.8,97.7 55.06,97.96 55.06,109.83
  Bottom 0.813: D3.A 120.6,109.83 | D2.A 33.42,109.92 33.42,109.83 | D4.A 68.07,110.13 68.07,109.83 | D5.A | 73.35,24.69 v73.35,36.62 | D6.A 32.7,24.7 32.71,24.69 | D1.A 118.66,24.7 118.66,24.69
  Bottom 1.422: S5V.1 101.14,41.35 124.86,41.35 126.79,39.42 126.79,26.21 125.27,24.7 D1.A 65.24,24.7 D5.A | D5.A 32.72,24.7 32.71,24.69 24.48,24.69 18.59,30.58 18.59,103.23 25.8,110.44 D2.A | 33.42,109.83 33.92,110.33 D4.A D3.A
+5V1  (via drill 0.6 pad 1.68, 0.7 pad 1.68)
  Top 0.406: D10.A 205.64,109.83 217.94,109.83 | 207.76,24.7 207.76,24.69 199.65,24.69
  Top 0.61: v218.2,97.7 217.94,97.96 217.94,109.83
  Top 0.813: D9.A 152.4,109.83 | D8.A 239.58,109.92 239.58,109.83 | D10.A 204.93,110.13 204.93,109.83 | D11.A | 199.65,24.69 v199.65,36.62 | D12.A 240.3,24.7 240.29,24.69 | D7.A 154.34,24.7 154.34,24.69
  Top 1.422: S5V1.1 171.86,41.35 148.14,41.35 146.21,39.42 146.21,26.21 147.73,24.7 D7.A 207.76,24.7 D11.A | D11.A 240.28,24.7 240.29,24.69 248.52,24.69 254.41,30.58 254.41,103.23 247.2,110.44 D8.A | 239.58,109.83 239.08,110.33 D10.A D9.A
  Bottom 0.406: 208.13,94.49 216.4,94.49 216.4,94.6 218.2,94.6 v218.2,97.7
  Bottom 0.61: Q26.1 196.45,47.09 196.45,40.13 197.72,38.86 199.75,38.86 | Q25.1 200.96,47.31 201.53,46.74 201.53,38.86 | Q13.1 211.44,47.6 | 211.44,47.6 211.44,47.24 | Q11.1 223.12,46.84 223.12,40.13 221.85,38.86 217.79,38.86 | 199.75,38.86 201.53,38.86 | 206.61,38.86 211.94,38.86 | 211.94,38.86 217.79,38.86 | Q24.1 206.61,47.09 206.61,38.86 | 211.44,47.6 211.94,47.09 211.94,38.86 | Q12.1 217.79,46.59 217.79,38.86 | Q23.1 219.56,84.99 219.56,93.22 218.29,94.49 213.72,94.49 | 213.72,94.49 208.13,94.49 | 208.13,94.49 203.31,94.49 | 203.31,94.49 198.23,94.49 | 198.23,94.49 194.42,94.49 193.15,93.22 193.15,85.09 193.82,84.41 Q16.1 | 198.23,94.49 198.23,84.43 198.5,84.16 Q27.1 | Q20.1 203.31,84.73 203.31,94.49 | Q21.1 208.13,85.24 208.13,94.49 | Q22.1 213.72,85.24 213.72,94.49 | 206.61,38.86 201.53,38.86 | v199.65,36.62 199.75,36.72 199.75,38.86
ADC  (via drill 0.6 pad 1.68)
  Top 0.254: IC1.10 56,63.02 55.11,62.13 v54.3,62.13
  Top 0.61: v82.7,49.58 82.78,49.67 92.22,49.67 R24.1
  Bottom 0.61: v54.3,62.13 69.44,62.13 71.47,60.1 | v82.7,49.58 81.02,49.58 77.46,53.14 C14.1 76.48,54.37 75.69,55.17 75.69,55.88 71.47,60.1 | R25.2 71.47,60.1
ADC1  (via drill 0.6 pad 1.68)
  Top 0.61: v218.7,62.13 203.56,62.13 201.53,60.1 | v190.3,49.58 191.98,49.58 195.54,53.14 C36.1 196.52,54.37 197.31,55.17 197.31,55.88 201.53,60.1 | R65.2 201.53,60.1
  Bottom 0.254: IC4.10 217,63.02 217.89,62.13 v218.7,62.13
  Bottom 0.61: v190.3,49.58 190.22,49.67 180.78,49.67 R64.1
CONN
  Top 0.61: 41.65,46.94 41.65,67.46 39.98,69.14 U1.32 | LED_CONN.A 40.48,45.77 41.65,46.94 | 41.65,46.94 43.15,48.44 1K.2
CONN1
  Bottom 0.61: 231.35,46.94 231.35,67.46 233.02,69.14 U2.32 | LED_CONN1.A 232.52,45.77 231.35,46.94 | 231.35,46.94 229.85,48.44 1K1.2
GND  (via drill 0.5 pad 1.68, 0.5 pad 1.93, 0.6 pad 1.68)
  Top 0.254: IC1.8 59.34,64.01 56.74,64.01 56.48,64.26 | 61.6,70.57 IC1.47 61.6,70.6 | 61.6,70.57 60.29,71.88 59.62,72.53 | 73.25,72.39 73.25,69.6 73.15,69.49 73.15,71.73 | 69.4,67.02 70.2,67.82 71.47,67.82 71.52,67.87 70.3,67.87 69.45,67.02 | 69.4,67.02 IC1.35 69.45,67.02 | 68.68,58.67 68.69,58.67 C4.2 | 66.9,58.67 68.68,58.67 | 68.68,58.67 68.93,58.42 68.93,57.4 69.18,57.15 69.18,58.12 68.68,58.62 66.95,58.62 66.9,58.67 | 51.39,66.31 51.66,66.04 | 61.6,70.6 59.5,72.7 | 61.6,70.57 61.6,70.6 | IC1.23 66.1,59.47 66.9,58.67 | 69.4,67.02 69.45,67.02 | 73.15,71.73 73.15,72.3 C3.2 | 73.15,71.73 73.86,72.44 77.62,72.44
  Top 0.305: 56.48,64.26 54.71,64.26 | 71.52,67.87 73.15,69.49
  Top 0.406: 54.71,64.26 52.93,66.04 51.66,66.04 49.88,66.04 49.39,65.55 C2.2 49.68,63.97 | C9.1 51.39,66.31 | 32.61,44.5 32.71,44.4 42.77,44.4 45.41,47.04 45.41,51.92 45.05,52.27 S5.1 49.68,58.29 49.68,63.5 | 77.62,72.44 78.23,72.44 79.14,73.36 79.14,75.89 80.26,77.01 93.67,77.01 94.48,76.2 94.48,75.22 R17.2 | 58.1,77.5 57.04,77.5 C7.2 | 49.68,63.5 49.68,63.97 | 49.68,63.97 49.68,64.41 49.37,64.72 49.37,63.8 49.68,63.5 | 49.68,63.5 49.47,63.27 47.03,63.27 46.43,62.69 46.43,60.86 45.92,60.35 44.19,60.35 43.63,60.91 43.63,68.22 43.9,68.49 C8.2 | v69.39,53.24 69.39,56.95 arc90 69.18,57.15
  Top 0.61: C1.2 59.62,72.53 | C3.2 77.55,72.41 v77.57,72.39 | R17.2 R16.2 R14.2 | R15.2 R14.2 | R13.2 94.52,62.48 | 94.52,62.48 R14.2 | C8.2 41.87,70.87 v41.24,70.66 41.19,71.12 40.74,71.12 40.33,71.53 40.33,74.47 41.04,75.18 47.34,75.18 48.8,76.64 48.8,79.7 | v40.48,82.75 42.01,84.23 42.01,90.3 40.87,91.44 30.07,91.44 24.99,96.52 | 59.5,72.7 59.5,76.1 58.1,77.5 51,77.5 48.8,79.7 | 48.8,79.7 48.8,85.1 47.6,86.3 47.6,93.9 48.4,94.7 51.2,94.7 52.1,95.6 52.1,99.1 53,100 57.6,100 57.91,99.69 57.91,98.25 58.81,97.35 R21.2 61.83,96.32 73.96,96.32 75.89,98.25 88.89,98.25 89.76,97.38 v89.76,96.01 | 24.38,54.05 25.16,54.05 U1.13 25.28,54.1 38.96,54.1 38.92,54.14 U1.22 36.99,52.89 U1.21 36.99,51.12 36.06,50.19 32.81,50.19 32.6,49.98 R39.2 32.61,48.9 R34.2 32.61,44.5 31.8,43.69 27.53,43.69 24.99,41.15 R18.2 24.97,38.77 R40.1 | LED3V.C 92.33,34.04 99.46,34.04 100.71,35.29 LED5V.C 101.41,37.27 R22.2 110.16,37.19 111.96,37.19 113.08,36.07 113.08,30.48 111.65,29.06 | R20.2 58.7,36.58 68.98,36.58 69.79,35.76 69.79,34.65 71.93,32.51 84.63,32.51 88.08,29.06 111.65,29.06 | 24.99,96.52 18.89,96.52 18.59,96.22 | 24.99,96.52 R19.2 | R14.2 94.52,92.69 98.55,96.72 101.19,96.72 102.81,98.35 102.81,110.24 102.92,110.34 | v100.36,62.69 94.72,62.69 94.52,62.48 | R23.2 112.58,96.93 114.29,96.93 115.11,97.74 115.11,104.34 114.6,104.85 v113.69,106.17 | 111.65,29.06 111.14,28.55 v111.14,27.43
  Top 0.813: v113.69,106.17 113.69,110.34
  Top 1.016: v111.14,27.43 111.14,26.42 109.52,24.79 59.94,24.79 | 59.94,24.79 25.8,24.79 | 25.8,24.79 23.97,24.79 18.59,30.18 18.59,96.22 18.59,103.33 25.6,110.34 26.41,110.34 | 26.41,110.34 60.14,110.34 | 60.14,110.34 102.92,110.34 113.69,110.34 123.64,110.34 129.13,104.85 129.13,94.39 | 129.13,94.39 129.13,83.01 U$1.P$NEG | v60.14,106.88 60.14,110.34 | v26.41,107.39 26.41,110.34 | v25.8,26.92 25.8,24.79 | v57.7,27.64 57.7,24.89 59.94,24.79 | v127.3,94.08 127.6,94.39 129.13,94.39
  Bottom 0.406: R27.1 89.82,95.69 89.76,95.76 v89.76,96.01 | C5.- 51.05,57 43.99,57 42.06,58.93 42.06,66.65 48.05,72.64 48.05,79.35 | v69.39,53.24 69.39,56.79 70.1,57.51 | 70.1,57.51 72.33,57.51 74.26,55.58 74.26,54.76 81.27,47.75 84.32,47.75 84.93,48.36 84.93,50.9 84.42,51.41 81.17,51.41 79.55,53.03 79.55,54.76 80.26,55.47 | 80.26,55.47 80.41,55.63 C15.- | IC2.1 94.85,54.01 | 95.3,61.98 95.19,61.98 95.19,62.69 91.74,66.14 91.74,73.76 95.5,77.52 95.5,79.96 96.51,80.97 | C14.2 79.36,56.37 80.26,55.47 | R37.1 65.08,57.51 70.1,57.51 | 62.28,31.62 JP2.1
  Bottom 0.61: C6.- v77.57,72.39 | v41.24,70.66 43.28,72.39 43.28,79.65 42.26,80.67 | R26.1 98.95,93.18 R28.1 103.13,93.18 104.74,94.79 | 104.74,94.79 104.74,100.99 102.61,103.12 SV13.20 SV13.18 SV13.16 SV13.14 SV13.12 SV13.10 SV13.8 SV13.6 SV13.4 | 86.19,55.63 C16.2 82.41,55.36 C15.- 88.49,61.98 95.19,61.98 | SKEYBT.3 48.25,38.1 48.25,33.93 47.14,32.82 39.82,32.82 38.91,33.73 38.91,36.17 37.59,37.49 30.98,37.49 30.06,36.57 JP1.2 JP1.1 | C13.2 108.25,80.18 | 108.25,80.18 C10.2 | 108.25,80.18 108.2,80.23 108.2,81.18 108.05,81.03 IC3.2 104.34,80.97 96.51,80.97 95.8,81.69 95.8,85.85 98.8,88.85 C11.- 104.85,88.9 104.74,89.01 104.74,94.59 104.74,94.79 | 42.26,80.67 40.48,82.45 v40.48,82.75 | 48.05,79.35 48.05,80.06 47.44,80.67 42.26,80.67 | v100.36,62.69 100.72,62.23 C12.- | 94.85,54.01 96.11,55.27 96.11,60.86 95.3,61.67 95.3,61.98 | C21.2 60.97,30.9 61.41,31.34 | C18.2 113.9,30.16 113.89,30.18 | C20.2 27.73,28.85 27.68,28.91 | C17.2 28.7,106.11
  Bottom 0.813: JP3.1 JP3.2 115.82,34.73 115.82,32.11 113.89,30.18 v111.14,27.43 | C12.- 107.69,59.03 107.69,57.4 108.5,56.59 115.11,56.59 115.36,56.84 | 115.36,56.84 119.45,60.94 DC.1 | X1.1 124.39,46.23 118.36,46.23 115.36,49.23 115.36,56.84 | 124.45,92.05 122.02,94.49 104.85,94.49 arc-90 104.74,94.59
  Bottom 1.016: JP6.1 JP6.2 118.5,102.88 117.44,103.94 116.73,103.94 | JP5.1 JP5.2 65.26,103.29 64.21,104.34 63.29,104.34 | JP4.1 JP4.2 31.06,102.72 29.84,103.94 28.95,103.94 | JP1.1 30.06,31.29 27.73,28.96 27.68,28.91 v25.8,26.92 | JP2.1 JP2.2 62.67,32.6 61.41,31.34 v57.7,27.64 | BATTERY.1 126.58,94.08 v127.3,94.08 | 28.95,103.94 28.85,103.94 26.41,106.38 v26.41,107.39 | 28.7,106.11 28.95,105.85 28.95,103.94 | 63.29,104.34 61.56,104.34 60.14,105.77 v60.14,106.88 | C22.2 63.31,104.36 63.29,104.34 | 116.73,103.94 114.7,103.94 113.79,104.85 113.79,106.07 v113.69,106.17 | C19.2 116.65,104.02 116.73,103.94
  Bottom 1.676: DC.1 119.78,60.88 119.78,60.15 112.06,67.87 112.06,71.63 115.31,74.88 115.31,84.63 122.73,92.05 122.73,92.15 124.35,92.15 arc-90 124.45,92.05 | BATTERY.1 122.93,91.95
  pour Bottom (isolate 0.61): 7.61,128.63 133.4,128.83 133.4,6.91 8.43,6.91
  pour Top (isolate 0.61): 7.26,128.93 133.45,128.73 133.45,7.26 8.48,7.26
GND1  (via drill 0.5 pad 1.68, 0.5 pad 1.93, 0.6 pad 1.68)
  Top 0.406: R67.1 183.18,95.69 183.24,95.76 v183.24,96.01 | C28.- 221.95,57 229.01,57 230.94,58.93 230.94,66.65 224.95,72.64 224.95,79.35 | v203.61,53.24 203.61,56.79 202.9,57.51 | 202.9,57.51 200.67,57.51 198.74,55.58 198.74,54.76 191.73,47.75 188.68,47.75 188.07,48.36 188.07,50.9 188.58,51.41 191.83,51.41 193.45,53.03 193.45,54.76 192.74,55.47 | 192.74,55.47 192.59,55.63 C37.- | IC5.1 178.15,54.01 | 177.71,61.98 177.81,61.98 177.81,62.69 181.26,66.14 181.26,73.76 177.5,77.52 177.5,79.96 176.49,80.97 | C36.2 193.64,56.37 192.74,55.47 | R77.1 207.92,57.51 202.9,57.51 | 210.72,31.62 JP8.1
  Top 0.61: C26.- v195.43,72.39 | v231.76,70.66 229.72,72.39 229.72,79.65 230.74,80.67 | R66.1 174.05,93.18 R68.1 169.87,93.18 168.26,94.79 | 168.26,94.79 168.26,100.99 170.39,103.12 SV1.20 SV1.18 SV1.16 SV1.14 SV1.12 SV1.10 SV1.8 SV1.6 SV1.4 | 186.81,55.63 C38.2 190.59,55.36 C37.- 184.51,61.98 177.81,61.98 | SKEYBT1.3 224.75,38.1 224.75,33.93 225.86,32.82 233.18,32.82 234.09,33.73 234.09,36.17 235.41,37.49 242.02,37.49 242.94,36.57 JP7.2 JP7.1 | C35.2 164.75,80.18 | 164.75,80.18 C32.2 | 164.75,80.18 164.8,80.23 164.8,81.18 164.95,81.03 IC6.2 168.66,80.97 176.49,80.97 177.2,81.69 177.2,85.85 174.2,88.85 C33.- 168.15,88.9 168.26,89.01 168.26,94.59 168.26,94.79 | 230.74,80.67 232.52,82.45 v232.52,82.75 | 224.95,79.35 224.95,80.06 225.56,80.67 230.74,80.67 | v172.64,62.69 172.28,62.23 C34.- | 178.15,54.01 176.89,55.27 176.89,60.86 177.71,61.67 177.71,61.98 | C43.2 212.03,30.9 211.59,31.34 | C40.2 159.1,30.16 159.11,30.18 | C42.2 245.27,28.85 245.32,28.91 | C39.2 244.3,106.11
  Top 0.813: JP9.1 JP9.2 157.18,34.73 157.18,32.11 159.11,30.18 v161.85,27.43 | C34.- 165.31,59.03 165.31,57.4 164.5,56.59 157.89,56.59 157.64,56.84 | 157.64,56.84 153.55,60.94 DC1.1 | X2.1 148.61,46.23 154.64,46.23 157.64,49.23 157.64,56.84 | 148.55,92.05 150.98,94.49 168.15,94.49 arc90 168.26,94.59
  Top 1.016: JP12.1 JP12.2 154.5,102.88 155.56,103.94 156.27,103.94 | JP11.1 JP11.2 207.74,103.29 208.79,104.34 209.71,104.34 | JP10.1 JP10.2 241.94,102.72 243.16,103.94 244.05,103.94 | JP7.1 242.94,31.29 245.27,28.96 245.32,28.91 v247.2,26.92 | JP8.1 JP8.2 210.33,32.6 211.59,31.34 v215.3,27.64 | BATTERY1.1 146.42,94.08 v145.7,94.08 | 244.05,103.94 244.15,103.94 246.59,106.38 v246.59,107.39 | 244.3,106.11 244.05,105.85 244.05,103.94 | 209.71,104.34 211.44,104.34 212.86,105.77 v212.86,106.88 | C44.2 209.69,104.36 209.71,104.34 | 156.27,103.94 158.3,103.94 159.21,104.85 159.21,106.07 v159.31,106.17 | C41.2 156.35,104.02 156.27,103.94
  Top 1.676: DC1.1 153.22,60.88 153.22,60.15 160.94,67.87 160.94,71.63 157.69,74.88 157.69,84.63 150.27,92.05 150.27,92.15 148.65,92.15 arc90 148.55,92.05 | BATTERY1.1 150.07,91.95
  Bottom 0.254: IC4.8 213.66,64.01 216.26,64.01 216.52,64.26 | 211.4,70.57 IC4.47 211.4,70.6 | 211.4,70.57 212.71,71.88 213.38,72.53 | 199.75,72.39 199.75,69.6 199.85,69.49 199.85,71.73 | 203.6,67.02 202.8,67.82 201.53,67.82 201.48,67.87 202.7,67.87 203.55,67.02 | 203.6,67.02 IC4.35 203.55,67.02 | 204.32,58.67 204.31,58.67 C25.2 | 206.1,58.67 204.32,58.67 | 204.32,58.67 204.07,58.42 204.07,57.4 203.82,57.15 203.82,58.12 204.32,58.62 206.05,58.62 206.1,58.67 | 221.61,66.31 221.34,66.04 | 211.4,70.6 213.5,72.7 | 211.4,70.57 211.4,70.6 | IC4.23 206.9,59.47 206.1,58.67 | 203.6,67.02 203.55,67.02 | 199.85,71.73 199.85,72.3 C24.2 | 199.85,71.73 199.14,72.44 195.38,72.44
  Bottom 0.305: 216.52,64.26 218.29,64.26 | 201.48,67.87 199.85,69.49
  Bottom 0.406: 218.29,64.26 220.07,66.04 221.34,66.04 223.12,66.04 223.61,65.55 C27.2 223.32,63.97 | C31.1 221.61,66.31 | 240.39,44.5 240.29,44.4 230.23,44.4 227.59,47.04 227.59,51.92 227.95,52.27 S1.1 223.32,58.29 223.32,63.5 | 195.38,72.44 194.77,72.44 193.86,73.36 193.86,75.89 192.74,77.01 179.33,77.01 178.52,76.2 178.52,75.22 R57.2 | 214.9,77.5 215.96,77.5 C29.2 | 223.32,63.5 223.32,63.97 | 223.32,63.97 223.32,64.41 223.63,64.72 223.63,63.8 223.32,63.5 | 223.32,63.5 223.53,63.27 225.97,63.27 226.57,62.69 226.57,60.86 227.08,60.35 228.81,60.35 229.37,60.91 229.37,68.22 229.1,68.49 C30.2 | v203.61,53.24 203.61,56.95 arc-90 203.82,57.15
  Bottom 0.61: C23.2 213.38,72.53 | C24.2 195.45,72.41 v195.43,72.39 | R57.2 R56.2 R54.2 | R55.2 R54.2 | R53.2 178.48,62.48 | 178.48,62.48 R54.2 | C30.2 231.13,70.87 v231.76,70.66 231.81,71.12 232.26,71.12 232.67,71.53 232.67,74.47 231.96,75.18 225.66,75.18 224.2,76.64 224.2,79.7 | v232.52,82.75 230.99,84.23 230.99,90.3 232.13,91.44 242.93,91.44 248.01,96.52 | 213.5,72.7 213.5,76.1 214.9,77.5 222,77.5 224.2,79.7 | 224.2,79.7 224.2,85.1 225.4,86.3 225.4,93.9 224.6,94.7 221.8,94.7 220.9,95.6 220.9,99.1 220,100 215.4,100 215.09,99.69 215.09,98.25 214.19,97.35 R61.2 211.17,96.32 199.04,96.32 197.11,98.25 184.11,98.25 183.24,97.38 v183.24,96.01 | 248.62,54.05 247.84,54.05 U2.13 247.72,54.1 234.04,54.1 234.08,54.14 U2.22 236.01,52.89 U2.21 236.01,51.12 236.94,50.19 240.19,50.19 240.4,49.98 R79.2 240.39,48.9 R74.2 240.39,44.5 241.21,43.69 245.47,43.69 248.01,41.15 R58.2 248.03,38.77 R80.1 | LED3V1.C 180.67,34.04 173.54,34.04 172.29,35.29 LED5V1.C 171.59,37.27 R62.2 162.84,37.19 161.04,37.19 159.93,36.07 159.93,30.48 161.35,29.06 | R60.2 214.3,36.58 204.02,36.58 203.21,35.76 203.21,34.65 201.07,32.51 188.37,32.51 184.92,29.06 161.35,29.06 | 248.01,96.52 254.11,96.52 254.41,96.22 | 248.01,96.52 R59.2 | R54.2 178.48,92.69 174.45,96.72 171.81,96.72 170.19,98.35 170.19,110.24 170.09,110.34 | v172.64,62.69 178.28,62.69 178.48,62.48 | R63.2 160.42,96.93 158.71,96.93 157.89,97.74 157.89,104.34 158.4,104.85 v159.31,106.17 | 161.35,29.06 161.85,28.55 v161.85,27.43
  Bottom 0.813: v159.31,106.17 159.31,110.34
  Bottom 1.016: v161.85,27.43 161.85,26.42 163.48,24.79 213.06,24.79 | 213.06,24.79 247.2,24.79 | 247.2,24.79 249.03,24.79 254.41,30.18 254.41,96.22 254.41,103.33 247.4,110.34 246.59,110.34 | 246.59,110.34 212.86,110.34 | 212.86,110.34 170.09,110.34 159.31,110.34 149.36,110.34 143.87,104.85 143.87,94.39 | 143.87,94.39 143.87,83.01 U$6.P$NEG | v212.86,106.88 212.86,110.34 | v246.59,107.39 246.59,110.34 | v247.2,26.92 247.2,24.79 | v215.3,27.64 215.3,24.89 213.06,24.79 | v145.7,94.08 145.4,94.39 143.87,94.39
  pour Top (isolate 0.61): 265.39,128.63 139.6,128.83 139.6,6.91 264.57,6.91
  pour Bottom (isolate 0.61): 265.74,128.93 139.55,128.73 139.55,7.26 264.52,7.26
JTCK  (via drill 0.6 pad 1.68)
  Top 0.254: IC1.37 66.64,69.31 66.64,69.85 66.9,70.1 67.66,70.1 v68.17,69.6
  Top 0.406: v87.22,84.17 87.22,87.48 85.9,88.79 85.9,90.89 87.47,92.46 v87.47,95.76
  Bottom 0.406: v68.17,69.6 68.93,68.83 71.72,68.83 72.99,70.1 72.99,71.12 74.77,72.9 74.77,76.2 76.55,77.98 82.14,77.98 84.93,80.77 84.93,82.96 87.22,82.96 | SV13.9 87.98,96.27 v87.47,95.76 | R29.1 89.57,81.28 88.49,81.28 88.23,81.53 88.23,82.45 87.73,82.96 87.22,82.96 | 87.22,82.96 v87.22,84.17
JTCK1  (via drill 0.6 pad 1.68)
  Top 0.406: v204.83,69.6 204.07,68.83 201.28,68.83 200.01,70.1 200.01,71.12 198.23,72.9 198.23,76.2 196.45,77.98 190.86,77.98 188.07,80.77 188.07,82.96 185.78,82.96 | SV1.9 185.02,96.27 v185.53,95.76 | R69.1 183.43,81.28 184.51,81.28 184.77,81.53 184.77,82.45 185.27,82.96 185.78,82.96 | 185.78,82.96 v185.78,84.17
  Bottom 0.254: IC4.37 206.36,69.31 206.36,69.85 206.1,70.1 205.34,70.1 v204.83,69.6
  Bottom 0.406: v185.78,84.17 185.78,87.48 187.1,88.79 187.1,90.89 185.53,92.46 v185.53,95.76
JTDI  (via drill 0.6 pad 1.68)
  Top 0.254: IC1.38 66.1,69.24 66.1,70.29 66.9,71.12 69.95,71.12 v70.35,70.61
  Top 0.406: v82.9,95.5 82.9,87.38 83.92,86.36 v84.68,86.36
  Bottom 0.406: v70.35,70.61 71.72,70.61 71.98,70.87 71.98,71.88 73.76,73.66 73.76,76.71 76.04,78.99 81.63,78.99 83.92,81.28 83.92,85.6 v84.68,86.36 84.68,86.14 88.01,86.14 R31.1 89.57,84.58 | SV13.5 v82.9,95.5
JTDI1  (via drill 0.6 pad 1.68)
  Top 0.406: v202.65,70.61 201.28,70.61 201.02,70.87 201.02,71.88 199.24,73.66 199.24,76.71 196.96,78.99 191.37,78.99 189.08,81.28 189.08,85.6 v188.32,86.36 188.32,86.14 184.99,86.14 R71.1 183.43,84.58 | SV1.5 v190.1,95.5
  Bottom 0.254: IC4.38 206.9,69.24 206.9,70.29 206.1,71.12 203.05,71.12 v202.65,70.61
  Bottom 0.406: v190.1,95.5 190.1,87.38 189.08,86.36 v188.32,86.36
JTDO  (via drill 0.6 pad 1.68)
  Top 0.254: IC1.39 65.6,70.84 66.9,72.14 69.48,72.14 v70.19,72.94
  Top 0.406: v93.82,96.01 93.82,93.47 91.24,90.89 89.15,90.89 87.77,89.51 v87.77,89.41
  Bottom 0.406: v70.19,72.94 70.8,72.94 72.49,74.62 72.49,76.96 75.79,80.26 81.38,80.26 82.9,81.79 82.9,87.17 83.62,87.88 87.77,87.88 | SV13.13 93.82,99.82 v93.82,96.01 | R33.1 89.57,87.88 87.77,87.88 | 87.77,87.88 v87.77,89.41
JTDO1  (via drill 0.6 pad 1.68)
  Top 0.406: v202.81,72.94 202.2,72.94 200.51,74.62 200.51,76.96 197.21,80.26 191.62,80.26 190.1,81.79 190.1,87.17 189.38,87.88 185.23,87.88 | SV1.13 179.18,99.82 v179.18,96.01 | R73.1 183.43,87.88 185.23,87.88 | 185.23,87.88 v185.23,89.41
  Bottom 0.254: IC4.39 207.4,70.84 206.1,72.14 203.52,72.14 v202.81,72.94
  Bottom 0.406: v179.18,96.01 179.18,93.47 181.76,90.89 183.85,90.89 185.23,89.51 v185.23,89.41
JTMS  (via drill 0.6 pad 1.68)
  Top 0.254: IC1.34 69.92,66.52 70.45,67.06 72.23,67.06 | 74.77,69.6 v74.77,69.85
  Top 0.305: 72.23,67.06 74.77,69.6
  Top 0.406: v85.44,93.48 85.44,92.46 84.93,91.95 84.93,88.49 86.2,87.22 86.2,85.5 85.44,84.74 85.44,82.3 86.2,81.53 v86.66,81.33
  Bottom 0.406: v74.77,69.85 76.04,71.12 76.04,76.2 76.8,76.96 82.39,76.96 84.68,79.25 86.2,79.25 | 86.2,79.25 86.52,79.25 R30.1 | SV13.7 v85.44,93.48 | v86.66,81.33 86.66,79.4 86.2,79.25
JTMS1  (via drill 0.6 pad 1.68)
  Top 0.406: v198.23,69.85 196.96,71.12 196.96,76.2 196.2,76.96 190.61,76.96 188.32,79.25 186.8,79.25 | 186.8,79.25 186.48,79.25 R70.1 | SV1.7 v187.56,93.48 | v186.34,81.33 186.34,79.4 186.8,79.25
  Bottom 0.254: IC4.34 203.08,66.52 202.55,67.06 200.77,67.06 | 198.23,69.6 v198.23,69.85
  Bottom 0.305: 200.77,67.06 198.23,69.6
  Bottom 0.406: v187.56,93.48 187.56,92.46 188.07,91.95 188.07,88.49 186.8,87.22 186.8,85.5 187.56,84.74 187.56,82.3 186.8,81.53 v186.34,81.33
KEY  (via drill 0.6 pad 1.68)
  Top 0.61: U1.34 38.14,72.24 35.86,72.24 34.89,73.2 34.89,76.76 37.58,79.45 v39.83,79.45
  Bottom 0.61: SKEYBT.2 43.43,41.76 41.38,43.81 28.27,43.7 25.5,46.48 25.5,73.91 31.03,79.45 v39.83,79.45
KEY1  (via drill 0.6 pad 1.68)
  Top 0.61: SKEYBT1.2 229.57,41.76 231.62,43.81 244.73,43.7 247.5,46.48 247.5,73.91 241.97,79.45 v233.17,79.45
  Bottom 0.61: U2.34 234.86,72.24 237.14,72.24 238.11,73.2 238.11,76.76 235.42,79.45 v233.17,79.45
LED1
  Top 0.254: IC1.11 57.37,62.52 55.21,60.36
  Top 0.356: 55.21,60.36 55.21,58.17
  Top 0.61: 55.21,58.17 52.42,55.37 49.12,55.37 46.58,52.83 46.58,46.74 43.07,43.23 34.08,43.23 32.86,42.01 29.05,42.01 26.92,39.88 26.92,32.16 25.72,30.95 LED_LEG1.A
LED2  (via drill 0.6 pad 1.68)  (1 unrouted)
  Top 0.254: IC1.12 58.56,62.02
  Top 0.305: 58.56,62.02 56.84,60.3 v56.84,59.28
  Top 0.61: 45.6,78.68 45.6,84.2 43.66,86.14 43.66,91.25 41.95,92.96 31.85,92.96 27,97.81 27,103 26.05,103.95 LED_LEG2.A
  Bottom 0.61: v56.84,59.28 56.48,58.67 56.48,57.66 53.69,54.86 43.02,54.86 40.99,56.9 40.99,67.06 45.56,71.63 45.56,78.64 v45.61,78.69
LED3
  Top 0.203: 61.08,59.72 61.09,60.19 IC1.13
  Top 0.254: 61.08,59.72 60.8,59.44 58.72,59.44 58.31,59.03 58.31,58.12 57.91,57.71 56.79,57.71 56.74,57.66
  Top 0.61: 56.74,57.66 52.93,53.85 49.63,53.85 47.85,52.07 47.85,33.02 50.9,29.97 57.28,29.97 LED_LEG3.A
LED4  (via drill 0.6 pad 1.68)
  Top 0.254: IC1.14 61.59,60.26 61.59,59.05 60.45,57.91 v59.83,57.91 | LED_LEG4.A 60.58,104.14 60.55,104.14
  Top 0.61: 60.55,104.14 60.29,103.89 58.26,103.89 58.05,103.9 53.2,103.9 50.3,101 50.3,97 49.6,96.3 47,96.3 45.2,94.5 45.2,87 47.3,84.9 47.3,77.38 46.53,76.61 40.18,76.61 v39.77,77.01
  Bottom 0.61: v39.77,77.01 39.21,76.35 39.21,56.39 42.26,53.34 54.71,53.34 59.28,57.91 v59.83,57.91
LED5
  Top 0.254: IC1.15 62.1,60.29 62.1,58.27
  Top 0.305: 56.48,55.63 60.09,55.63 61.56,57.1 61.56,57.73 62.1,58.27
  Top 0.356: 56.48,55.63 53.69,52.83 50.39,52.83 48.86,51.31 48.86,39.62
  Top 0.406: 48.86,39.62 50.64,37.85 70.76,37.85
  Top 0.61: LED_LEG5.A 110.08,30.99 109.95,31.11 109.57,30.73 88.87,30.73 85.31,34.29 72.38,34.29 71.52,35.15 71.52,37.08 70.76,37.85
LED6  (via drill 0.6 pad 1.68)
  Top 0.254: IC1.16 62.6,59.31 62.73,59.18 62.73,57.05
  Top 0.305: 62.73,57.05 59.79,54.1 v58.26,54.1
  Top 0.61: v80.53,60.5 81.83,60.5 84.47,57.86 95.68,57.86 98.06,60.25 101.19,60.25 102.2,61.27 102.2,64.41 100.88,65.73 98.85,65.73 97.02,67.56 97.02,91.54 99.56,94.08 101.59,94.08 104.54,97.03 104.54,101.3 107.2,103.95 LED_LEG6.A
  Bottom 0.406: v58.26,54.1 59.28,54.1 61.82,56.64 61.82,59.18 60.04,60.96 55.87,60.96 55.37,60.45 53.23,60.45 52.67,61.01 52.67,62.74 52.17,63.25 45.82,63.25 45.05,64.01 45.05,65.53 45.82,66.29 70.2,66.29 76.8,59.69 79.34,59.69 80.16,60.5 v80.53,60.5
LED7
  Bottom 0.254: IC4.11 215.63,62.52 217.79,60.36
  Bottom 0.356: 217.79,60.36 217.79,58.17
  Bottom 0.61: 217.79,58.17 220.58,55.37 223.88,55.37 226.42,52.83 226.42,46.74 229.93,43.23 238.92,43.23 240.14,42.01 243.95,42.01 246.08,39.88 246.08,32.16 247.28,30.95 LED_LEG7.A
LED8  (via drill 0.6 pad 1.68)  (1 unrouted)
  Top 0.61: v216.16,59.28 216.52,58.67 216.52,57.66 219.31,54.86 229.98,54.86 232.01,56.9 232.01,67.06 227.44,71.63 227.44,78.64 v227.39,78.69
  Bottom 0.254: IC4.12 214.44,62.02
  Bottom 0.305: 214.44,62.02 216.16,60.3 v216.16,59.28
  Bottom 0.61: 227.4,78.68 227.4,84.2 229.34,86.14 229.34,91.25 231.04,92.96 241.15,92.96 246,97.81 246,103 246.95,103.95 LED_LEG8.A
LED9
  Bottom 0.203: 211.92,59.72 211.91,60.19 IC4.13
  Bottom 0.254: 211.92,59.72 212.2,59.44 214.28,59.44 214.69,59.03 214.69,58.12 215.09,57.71 216.21,57.71 216.26,57.66
  Bottom 0.61: 216.26,57.66 220.07,53.85 223.37,53.85 225.15,52.07 225.15,33.02 222.1,29.97 215.72,29.97 LED_LEG9.A
LED10  (via drill 0.6 pad 1.68)
  Top 0.61: v233.23,77.01 233.79,76.35 233.79,56.39 230.74,53.34 218.29,53.34 213.72,57.91 v213.17,57.91
  Bottom 0.254: IC4.14 211.41,60.26 211.41,59.05 212.55,57.91 v213.17,57.91 | LED_LEG10.A 212.42,104.14 212.45,104.14
  Bottom 0.61: 212.45,104.14 212.71,103.89 214.74,103.89 214.95,103.9 219.8,103.9 222.7,101 222.7,97 223.4,96.3 226,96.3 227.8,94.5 227.8,87 225.7,84.9 225.7,77.38 226.47,76.61 232.82,76.61 v233.23,77.01
LED11
  Bottom 0.254: IC4.15 210.9,60.29 210.9,58.27
  Bottom 0.305: 216.52,55.63 212.91,55.63 211.44,57.1 211.44,57.73 210.9,58.27
  Bottom 0.356: 216.52,55.63 219.31,52.83 222.61,52.83 224.14,51.31 224.14,39.62
  Bottom 0.406: 224.14,39.62 222.36,37.85 202.24,37.85
  Bottom 0.61: LED_LEG11.A 162.92,30.99 163.05,31.11 163.43,30.73 184.13,30.73 187.69,34.29 200.62,34.29 201.48,35.15 201.48,37.08 202.24,37.85
LED12  (via drill 0.6 pad 1.68)
  Top 0.406: v214.74,54.1 213.72,54.1 211.18,56.64 211.18,59.18 212.96,60.96 217.13,60.96 217.63,60.45 219.77,60.45 220.33,61.01 220.33,62.74 220.83,63.25 227.18,63.25 227.95,64.01 227.95,65.53 227.18,66.29 202.8,66.29 196.2,59.69 193.66,59.69 192.84,60.5 v192.47,60.5
  Bottom 0.254: IC4.16 210.4,59.31 210.27,59.18 210.27,57.05
  Bottom 0.305: 210.27,57.05 213.21,54.1 v214.74,54.1
  Bottom 0.61: v192.47,60.5 191.17,60.5 188.53,57.86 177.32,57.86 174.94,60.25 171.81,60.25 170.8,61.27 170.8,64.41 172.12,65.73 174.15,65.73 175.98,67.56 175.98,91.54 173.44,94.08 171.41,94.08 168.46,97.03 168.46,101.3 165.8,103.95 LED_LEG12.A
LED_BAT1
  Top 0.254: IC1.29 68.41,64.02 68.42,64.01 70.96,64.01 71.22,63.75 74.01,63.75 74.77,62.99
  Top 0.305: 74.77,62.99 79.6,62.99
  Top 0.61: LED_BAT1.A 84.64,62.99 79.6,62.99
LED_BAT2
  Top 0.254: IC1.30 71.47,64.52
  Top 0.305: 71.47,64.52 71.57,64.41 78.23,64.41 arc-90 78.18,64.47
  Top 0.61: LED_BAT2.A 86.96,63.75 86.25,64.47 78.18,64.47
LED_BAT3
  Top 0.254: IC1.31 71.34,65.02 71.47,65.15 77.06,65.15 | 77.69,65.79 77.95,65.79
  Top 0.406: 77.06,65.15 77.69,65.79
  Top 0.61: LED_BAT3.A 85.91,65.79 77.95,65.79
LED_BAT4